# Altium PCB PCB1.PcbDoc
Units mm, origin at the board's own origin, x right, y up, seen from the top; angles counter-clockwise.
Board outline 139.45 x 77.09 mm, 2 copper layers (Top Layer, Bottom Layer); 25 components, 17 nets, 65 pads, 0 vias.
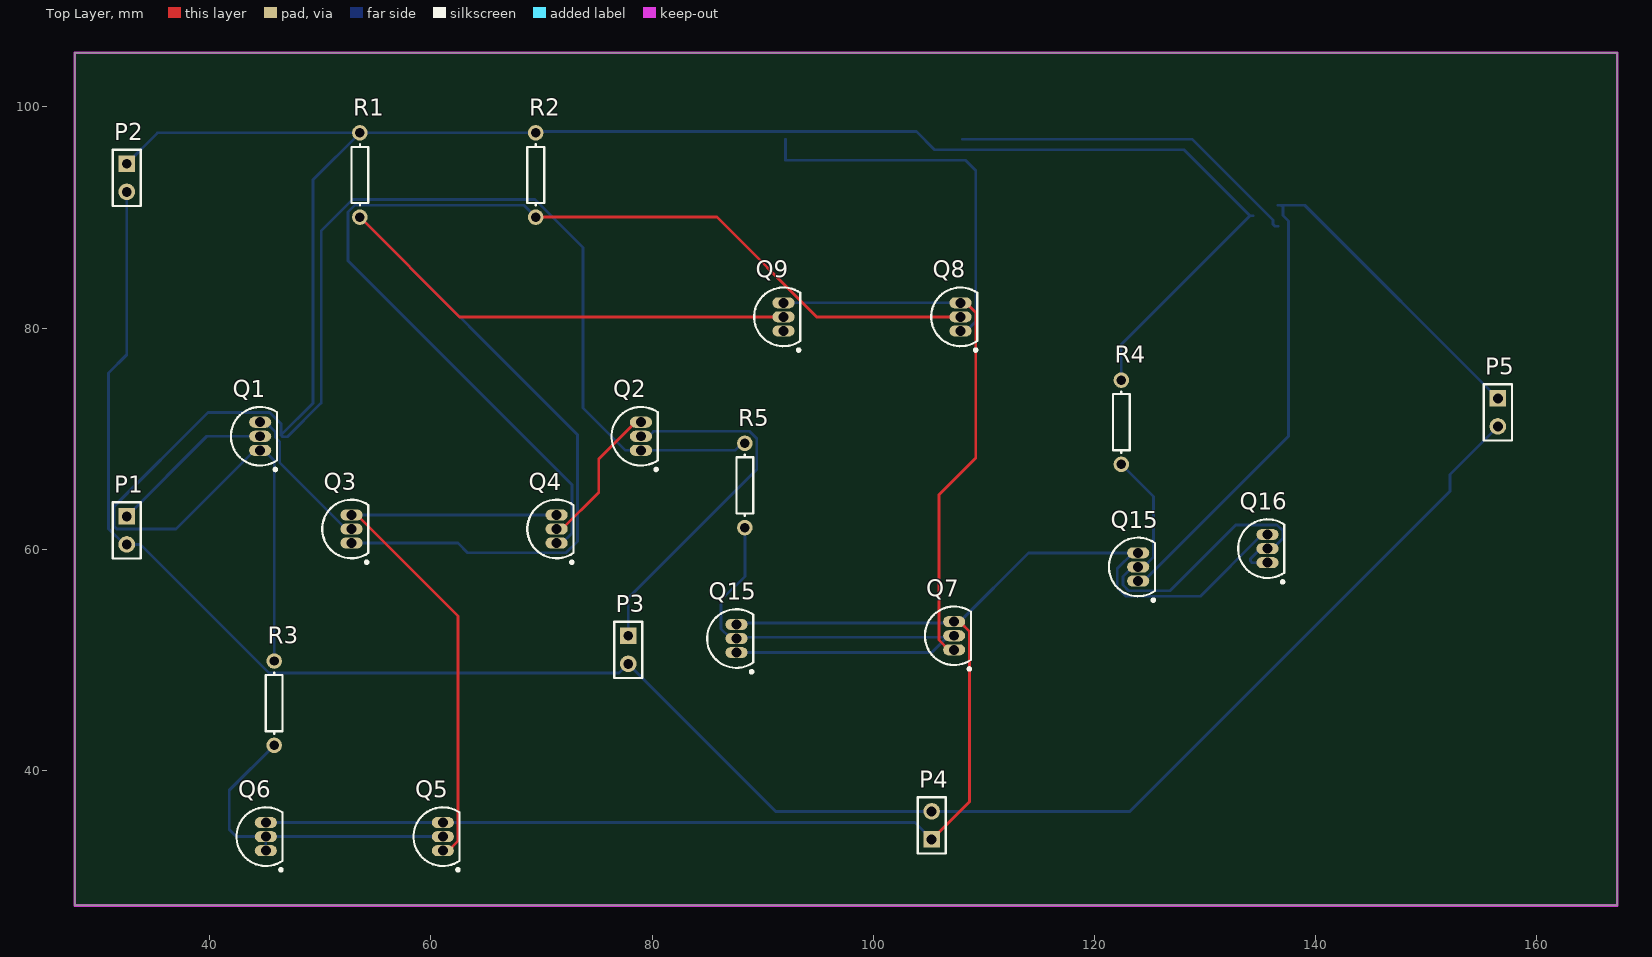
[diagram p0: Top Layer view]
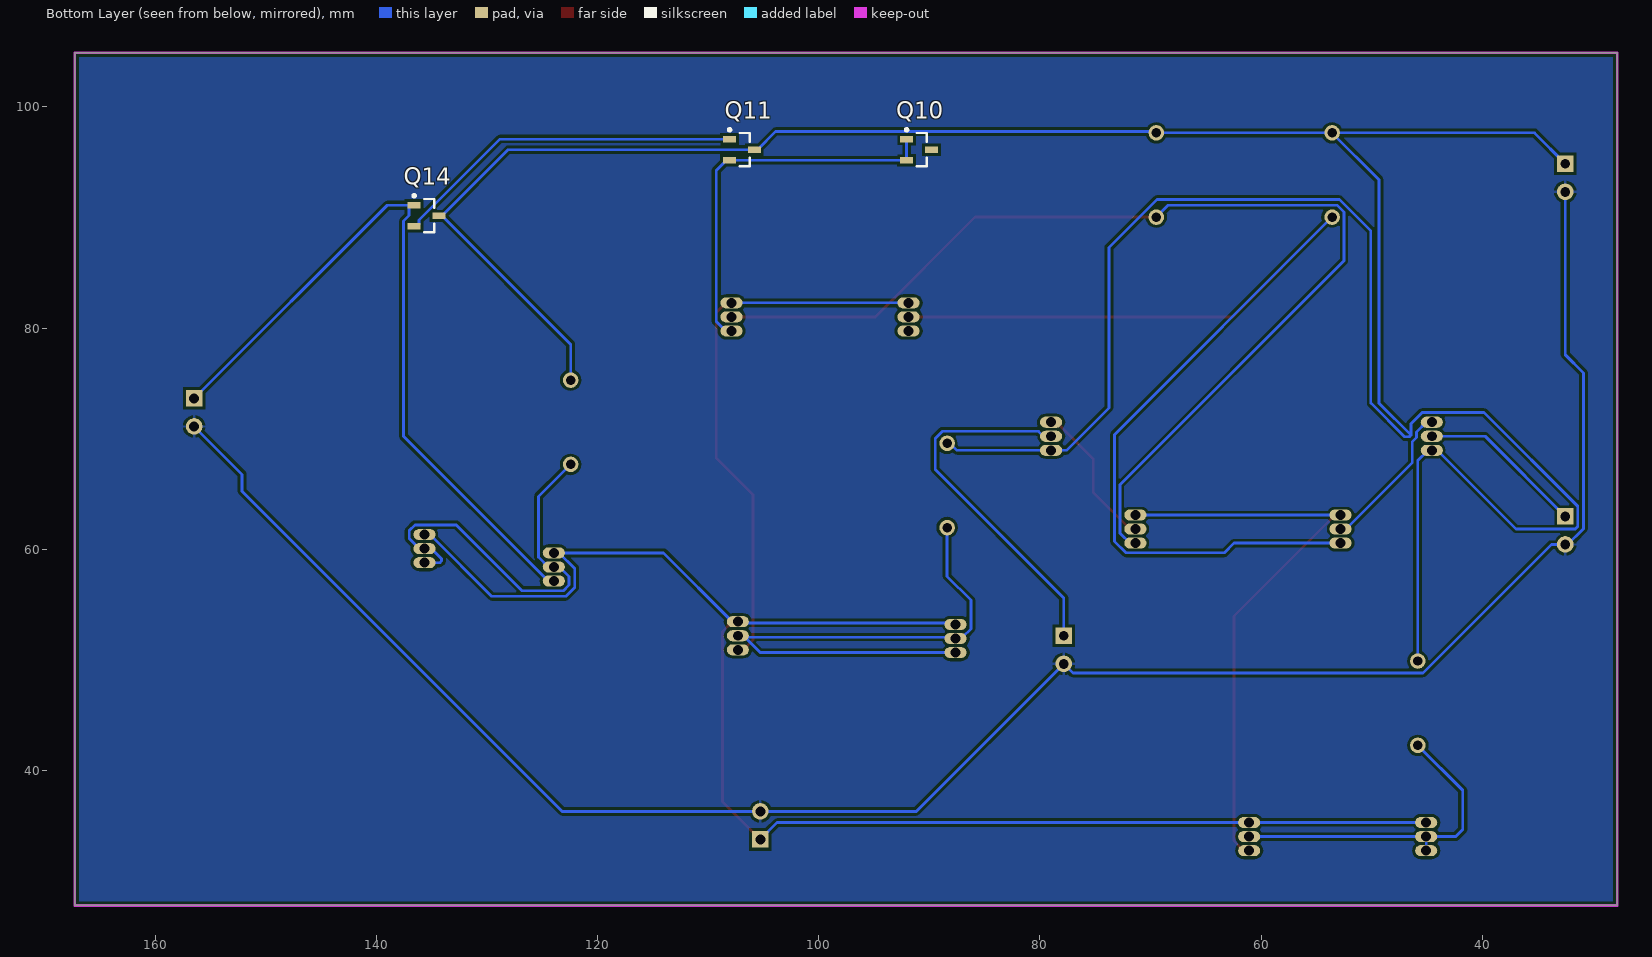
[diagram p1: Bottom Layer view, seen from below]

## Layer stack, top to bottom
Top Solder: solder mask 0.0102, Solder Resist, Dk 3.5
Top Layer: signal copper 0.0356
Dielectric 1: dielectric 0.32, FR-4, Dk 4.8
Bottom Layer: signal copper 0.0356
Bottom Solder: solder mask 0.0102, Solder Resist, Dk 3.5

## Board outline
27.813,27.813 27.813,104.902 167.259,104.902 167.259,27.813

## Design rules (kind name [scope] priority, off if disabled: settings)
Clearance [All] p1: gap=0.254 ignorepadtopadclearanceinfootprint=FALSE except(0: Arc-Hole Track-Hole SMDPad-Hole THPad-Hole Via-Hole Fill-Hole Poly-Hole Region-Hole Text-Hole)
PolygonConnect [All] p1: connectstyle=Relief reliefconductorwidth=0.254 reliefentries=4 polygonreliefangle="90 Angle" airgapwidth=0.254
RoutingVias [All] p1: holewidth=0.711 width=1.27 viastyle="Through Hole" minholewidth=0.711 minwidth=1.27 maxholewidth=0.711 maxwidth=1.27
SolderMaskExpansion [All] p1: expansion=0.102 istentingtop=FALSE
Width [All] p1: maxlimit=0.254 minlimit=0.254 preferedwidth=0.254
30 further rules are at their usual default settings.

## Classes and differential pairs
component class Sheet2: P1 P2 P3 P4 Q1 Q2 Q3 Q4 Q5 Q6 Q7 Q8 Q9 Q10 Q11 Q14 Q15 Q16 R1 R2 R3 R4 R5

## Components (designator, comment, footprint, x,y, rotation, side; value= is the part's Value field where it differs from the comment)
P1 "Header 2" HDR1X2 32.512,62.992 r270 top
P2 "Header 2" HDR1X2 32.512,94.869 r270 top
P3 "Header 2" HDR1X2 77.851,52.197 r270 top
P4 "Header 2" HDR1X2 105.283,33.782 r90 top
P5 "Header 2" HDR1X2 156.464,73.66 r270 top
Q1 "NPN" TO-226-AA 44.577,70.231 r0 top
Q2 "NPN" TO-226-AA 78.994,70.231 r0 top
Q3 "NPN" TO-226-AA 52.832,61.849 r0 top
Q4 "NPN" TO-226-AA 71.374,61.849 r0 top
Q5 "NPN" TO-226-AA 61.087,34.036 r0 top
Q6 "NPN" TO-226-AA 45.085,34.036 r0 top
Q7 "NPN" TO-226-AA 107.315,52.197 r0 top
Q8 "NPN" TO-226-AA 107.882,81.026 r0 top
Q9 "NPN" TO-226-AA 91.88,81.026 r0 top
Q10 "PNP" SOT-23B_N 90.932,96.139 r180 bottom
Q11 "PNP" SOT-23B_N 106.934,96.139 r180 bottom
Q14 "PNP" SOT-23B_N 135.455,90.17 r180 bottom
Q15 "NPN" TO-226-AA 87.63,51.943 r0 top
Q15 "NPN" TO-226-AA 123.952,58.42 r0 top
Q16 "NPN" TO-226-AA 135.636,60.071 r0 top
R1 "Res1" AXIAL-0.3 53.591,93.853 r90 top value=25K
R2 "Res1" AXIAL-0.3 69.486,93.853 r90 top value=25K
R3 "Res1" AXIAL-0.3 45.844,46.101 r90 top value=21.5K
R4 "Res1" AXIAL-0.3 122.428,71.501 r90 top value=4.3K
R5 "Res1" AXIAL-0.3 88.392,65.786 r90 top value=10.75K

## Footprints (in the part's own frame and the unit in brackets; to place one, negate y for a bottom-side part, rotate by r counter-clockwise, add the part's x,y. Pads: shape width x height; smd on the part's side, far side on the other; paste and mask are expansions set on the pad)
AXIAL-0.3 [mm] "Axial Device, Thru-Hole; 2 Leads; 0.3 in Pin Spacing"
  round 1.4 hole 0.85: 1(-3.81,0) 2(3.81,0)
  silkscreen extent -2.77,-0.76 2.77,0.76
HDR1X2 [mm] "Connector; Header; 2 Position"
  rect 1.5x1.5 hole 0.9: 1(0,0)
  round 1.5 hole 0.9: 2(2.54,0)
  silkscreen extent -1.27,-1.27 3.81,1.27
SOT-23B_N [mm] "SOT23, 3-Leads, Body 2.9x1.3mm, Pitch 0.95mm, Lead Span 2.4mm, IPC Medium Density"
  rect 1.15x0.6 smd: 1(-1.125,0.95) 2(-1.125,-0.95) 3(1.125,0)
  silkscreen extent -1.25,-1.5 0.7,1.92, body extent -0.7,-1.5 0.7,1.5, height 1.14
TO-226-AA [mm] "TO, Flat Index; 3 In-Line, Axial Leads; Body Dia. 4.8mm; Leads 0.55 x 0.51 mm (max)"
  oval 2x1 hole 0.9: 1(0,-1.27) 2(0,0) 3(0,1.27)
  silkscreen extent -2.65,-3.13 1.52,2.65, body extent -2.65,-2.66 1.52,2.66, height 5.33

## Part data
P1 P2 P3 P4 P5: "Header, 2-Pin", LatestRevisionDate=17-Jul-2002, LatestRevisionNote="Re-released for DXP Platform.", Publisher="Altium Limited"
Q1 Q2 Q3 Q4 Q5 Q6 Q7 Q8 Q9 Q15 Q15 Q16: "NPN Bipolar Transistor", Code_JEDEC=TO-226-AA, LatestRevisionDate=17-Jul-2002, LatestRevisionNote="Re-released for DXP Platform.", PackageDescription="TO, Flat Index; 3 In-Line, Axial Leads; Body Dia. 4.8mm; Leads 0.55 x 0.51 mm (max)", PackageReference=TO-226-AA, Published=8-Jun-2000, Publisher="Altium Limited"
Q10 Q11 Q14: "PNP Bipolar Transistor", LatestRevisionDate=29-May-2009, LatestRevisionNote="IPC-7351 Footprint Added.", PackageDescription="3-Pin SOT-23 Package 0.95 mm Pitch, 2.4 mm Lead Span", PackageReference=SOT-23B, PackageVersion=Aug-1999, Published=8-Jun-2000, Publisher="Altium Limited"
R1 R2 R3 R4 R5: "Resistor", LatestRevisionDate=17-Jul-2002, LatestRevisionNote="Re-released for DXP Platform.", PackageDescription="Axial Device, Thru-Hole; 2 Leads; 0.3 in Pin Spacing", PackageReference=AXIAL-0.3, Published=8-Jun-2000, Publisher="Altium Limited"

## Nets (pads, with @x,y where several pads share a name; then routed paths per layer and width w, separated by ;. In a path a pad name is that pad's centre, name@x,y a point inside that pad or via, vN(x,y) a via of type N, cw(c..) or ccw(c..) an arc to the next point about the centre after c; other vN are vias at no path point)
GND: P1.2 P2.2 P3.2 P4.2 P5.2 | length 183.3
  Bottom Layer w0.254: P2.2 32.512,77.604 30.873,75.965 30.873,61.874 32.295,60.452 33.759,60.452 45.381,48.83 77.024,48.83 P3.2 91.186,36.322 P4.2 123.19,36.322 152.128,65.26 152.128,66.784 P5.2
NetP1_1: P1.1 Q1.2 | length 15.1
  Bottom Layer w0.254: P1.1 39.751,70.231 Q1.2
NetP3_1: P3.1 Q2.2 | length 33.6
  Bottom Layer w0.254: P3.1 77.851,55.621 89.473,67.243 89.473,70.044 88.84,70.677 80.142,70.677 79.696,70.231 Q2.2
NetP5_1: P5.1 Q14.1 Q15.1@123.952,57.15 | length 66.8
  Bottom Layer w0.254: Q15.1@124.452,57.15 137.536,70.234 137.536,89.678 137.028,90.186 137.028,90.947 Q14.1@136.855,91.12 ; Q14.1 Q14.1@136.855,91.12 ; P5.1 139.004,91.12 Q14.1@136.855,91.12
NetQ1_3: Q1.3 Q3.2 | length 13.7
  Bottom Layer w0.254: Q1.3 45.077,71.501 45.958,70.62 45.958,70.121 46.352,69.727 46.352,67.829 52.332,61.849 Q3.2
NetQ2_3: Q2.3 Q4.2 | length 13.4
  Top Layer w0.254: Q4.2 71.874,61.849 75.184,65.159 75.184,68.191 78.494,71.501 Q2.3
NetQ3_1: Q3.1 Q9.2 R1.1 | length 100.7
  Top Layer w0.254: R1.1 62.608,81.026 Q9.2
  Bottom Layer w0.254: Q3.1 62.446,60.579 63.327,59.698 72.239,59.698 73.263,60.722 73.263,70.371 R1.1
NetQ3_3: Q3.3 Q4.3 Q5.1 | length 54
  Top Layer w0.254: Q3.3 53.332,63.119 62.468,53.983 62.468,33.647 61.587,32.766 Q5.1
  Bottom Layer w0.254: Q3.3 Q4.3
NetQ4_1: Q4.1 Q8.2 R2.1 | length 99
  Top Layer w0.254: R2.1 85.879,90.043 94.896,81.026 Q8.2
  Bottom Layer w0.254: R2.1 68.405,91.124 53.143,91.124 52.51,90.491 52.51,86.098 72.755,65.853 72.755,61.46 71.874,60.579 Q4.1
NetQ5_2: Q5.2 Q6.1 Q6.2 R3.1 | length 30.1
  Bottom Layer w0.254: Q6.1 Q6.2 ; R3.1 41.783,38.23 41.783,34.671 42.418,34.036 Q6.2 ; Q5.2 Q6.2
NetQ7_1: Q7.1 Q8.3 Q9.3 | length 50.5
  Top Layer w0.254: Q7.1 106.815,50.927 105.934,51.808 105.934,64.947 109.263,68.276 109.263,81.415 108.382,82.296 Q8.3
  Bottom Layer w0.254: Q9.3 Q8.3
NetQ7_2: Q7.2 Q15.1@87.63,50.673 Q15.2@87.63,51.943 R5.1 | length 51.8
  Bottom Layer w0.254: Q15.1@87.63,50.673 105.291,50.673 Q7.2@106.688,52.07 ; Q15.2@87.63,51.943 87.757,52.07 Q15.2@88.257,52.07 ; R5.1 88.392,57.566 86.249,55.423 86.249,52.824 87.003,52.07 Q15.2@88.257,52.07 ; Q7.2 107.188,52.07 Q7.2@106.688,52.07 ; Q15.2@88.257,52.07 Q7.2@106.688,52.07
NetQ8_1: Q8.1 Q10.1 Q10.2 Q11.2 | length 34.9
  Bottom Layer w0.254: Q10.1 Q10.2 Q11.2 108.334,95.189 109.263,94.26 109.263,80.618 108.401,79.756 Q8.1
NetQ11_1: Q11.1 Q14.2 | length 32
  Bottom Layer w0.254: Q11.1 128.825,97.089 136.132,89.782 136.132,89.393 136.305,89.22 Q14.2
NetQ15_2: Q15.2@123.952,58.42 Q16.1 Q16.2 R4.1 | length 37.4
  Bottom Layer w0.254: R4.1 125.333,64.786 125.333,59.301 124.452,58.42 123.952,58.42 123.452,58.42 122.571,57.539 122.571,56.785 123.087,56.269 126.817,56.269 132.77,62.222 136.501,62.222 137.017,61.706 137.017,60.976 136.109,60.068 135.014,60.068 134.106,59.16 134.106,58.95 134.255,58.801 Q16.1
VCC: P2.1 Q1.1 Q2.1 Q11.3 Q14.3 R1.2 R2.2 R3.2 R4.2 R5.2 | length 292.1
  Bottom Layer w0.254: P2.1 35.306,97.663 R1.2 ; R3.2 45.844,68.044 44.927,68.961 44.077,68.961 36.977,61.861 31.604,61.861 31.381,62.084 31.381,63.9 39.863,72.382 45.442,72.382 46.466,71.358 46.466,70.331 ; R5.2 88.133,69.596 87.498,68.961 Q2.1 77.613,68.961 73.773,72.801 73.773,87.284 69.426,91.632 52.933,91.632 50.089,88.789 50.089,73.236 47.036,70.182 46.615,70.182 46.466,70.331 ; R4.2 122.425,75.314 122.425,78.54 Q14.3@134.055,90.17 ; Q14.3 Q14.3@134.055,90.17 ; 46.466,70.331 49.351,73.216 49.351,93.423 R1.2 ; R1.2 R2.2 69.593,97.77 103.903,97.77 105.534,96.139 Q11.3 128.086,96.139 Q14.3@134.055,90.17
VEE: P4.1 Q5.3 Q6.3 Q7.3 Q15.3 Q16.3 | length 142.2
  Top Layer w0.254: P4.1 108.696,37.195 108.696,52.586 107.815,53.467 Q7.3
  Bottom Layer w0.254: Q6.3 Q5.3 103.759,35.306 P4.1 ; Q15.3@87.63,53.213 87.757,53.34 107.188,53.34 Q7.3 107.815,53.467 114.038,59.69 123.952,59.69 123.476,59.69 122.063,58.277 122.063,56.575 122.877,55.761 129.556,55.761 135.136,61.341 Q16.3
pads on no net: Q9.1 Q10.3

## Polygon pours and split planes (outlines as drawn)
GND on Bottom Layer "GND_L02_P002" (solid, pour order 2): 27.813,27.813 27.813,104.902 167.259,104.902 167.259,27.94 27.94,27.94

## Keep-outs
Keep-Out Layer:
  lines w0.254: 27.813,27.813 28.829,27.813 167.259,27.813 167.259,28.067 167.259,104.14 167.259,104.902 27.813,104.902 27.813,40.259 27.813,28.829 27.813,27.813